# Altium PCB PCB1.PcbDoc
Units mil, origin at the board's own origin, x right, y up, seen from the top; angles counter-clockwise.
Board outline 2447.97 x 1725 mil, 2 copper layers (Top Layer, Bottom Layer); 56 components, 31 nets, 180 pads, 170 vias.
Unrouted connection lines stored in the file: 1.
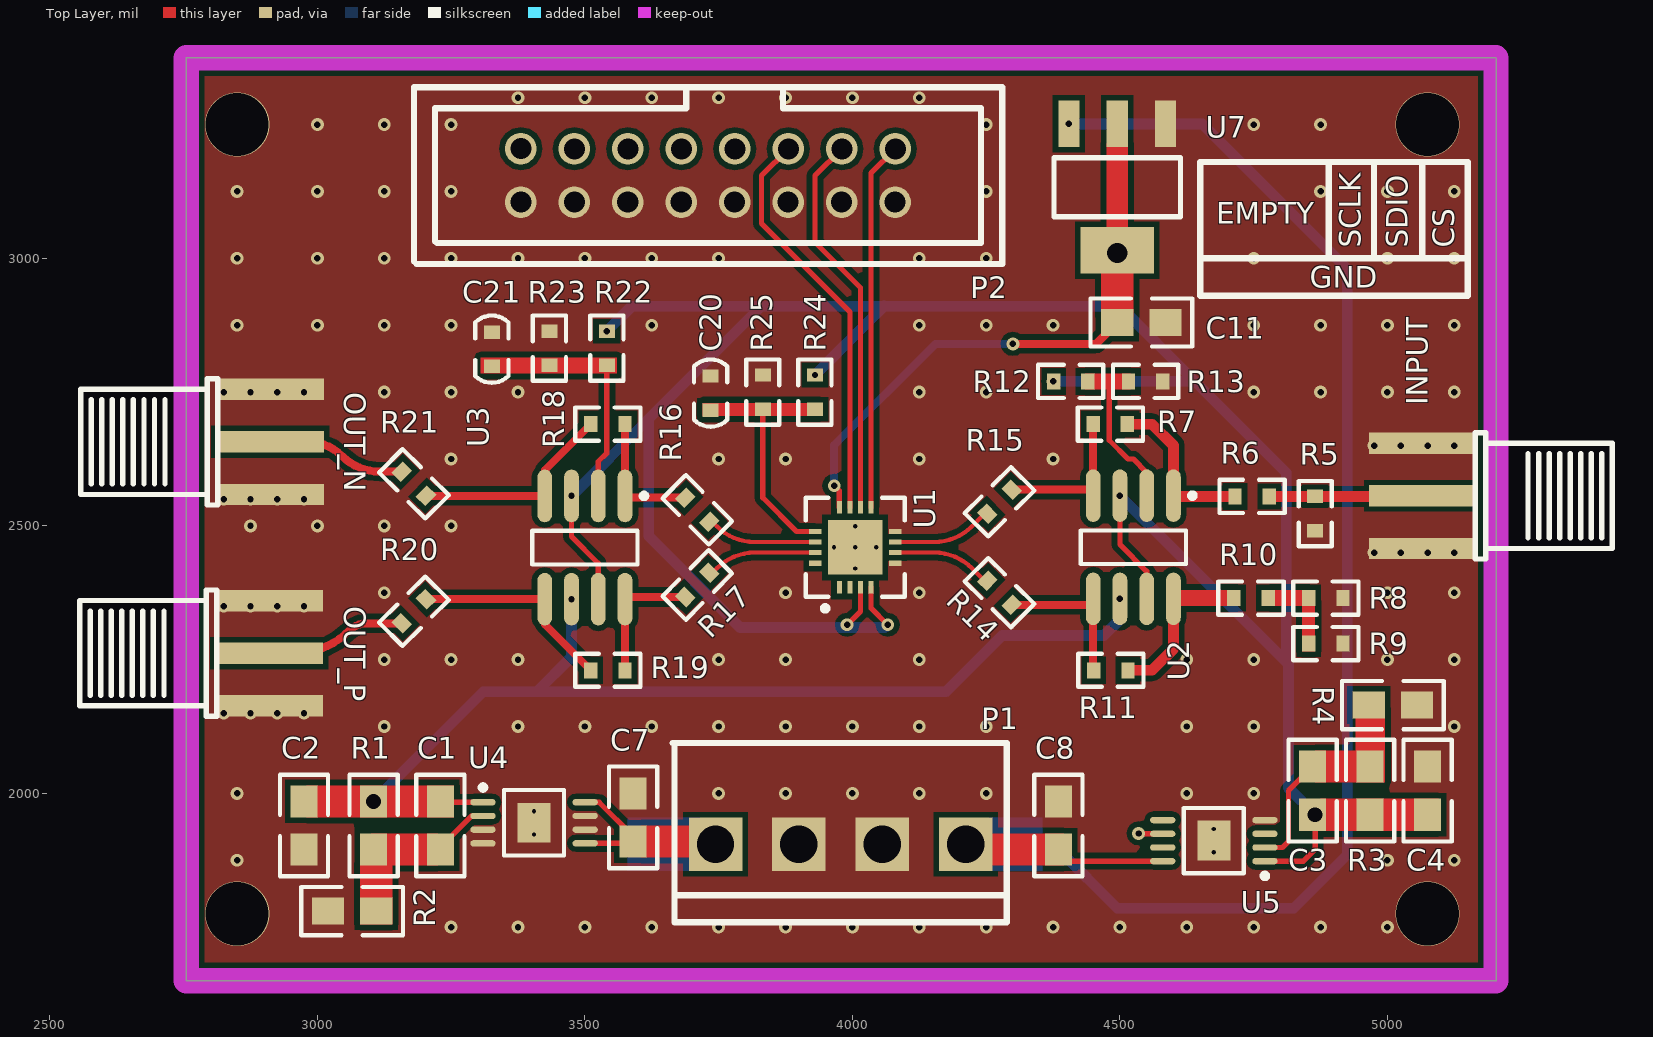
[diagram p0: Top Layer view]
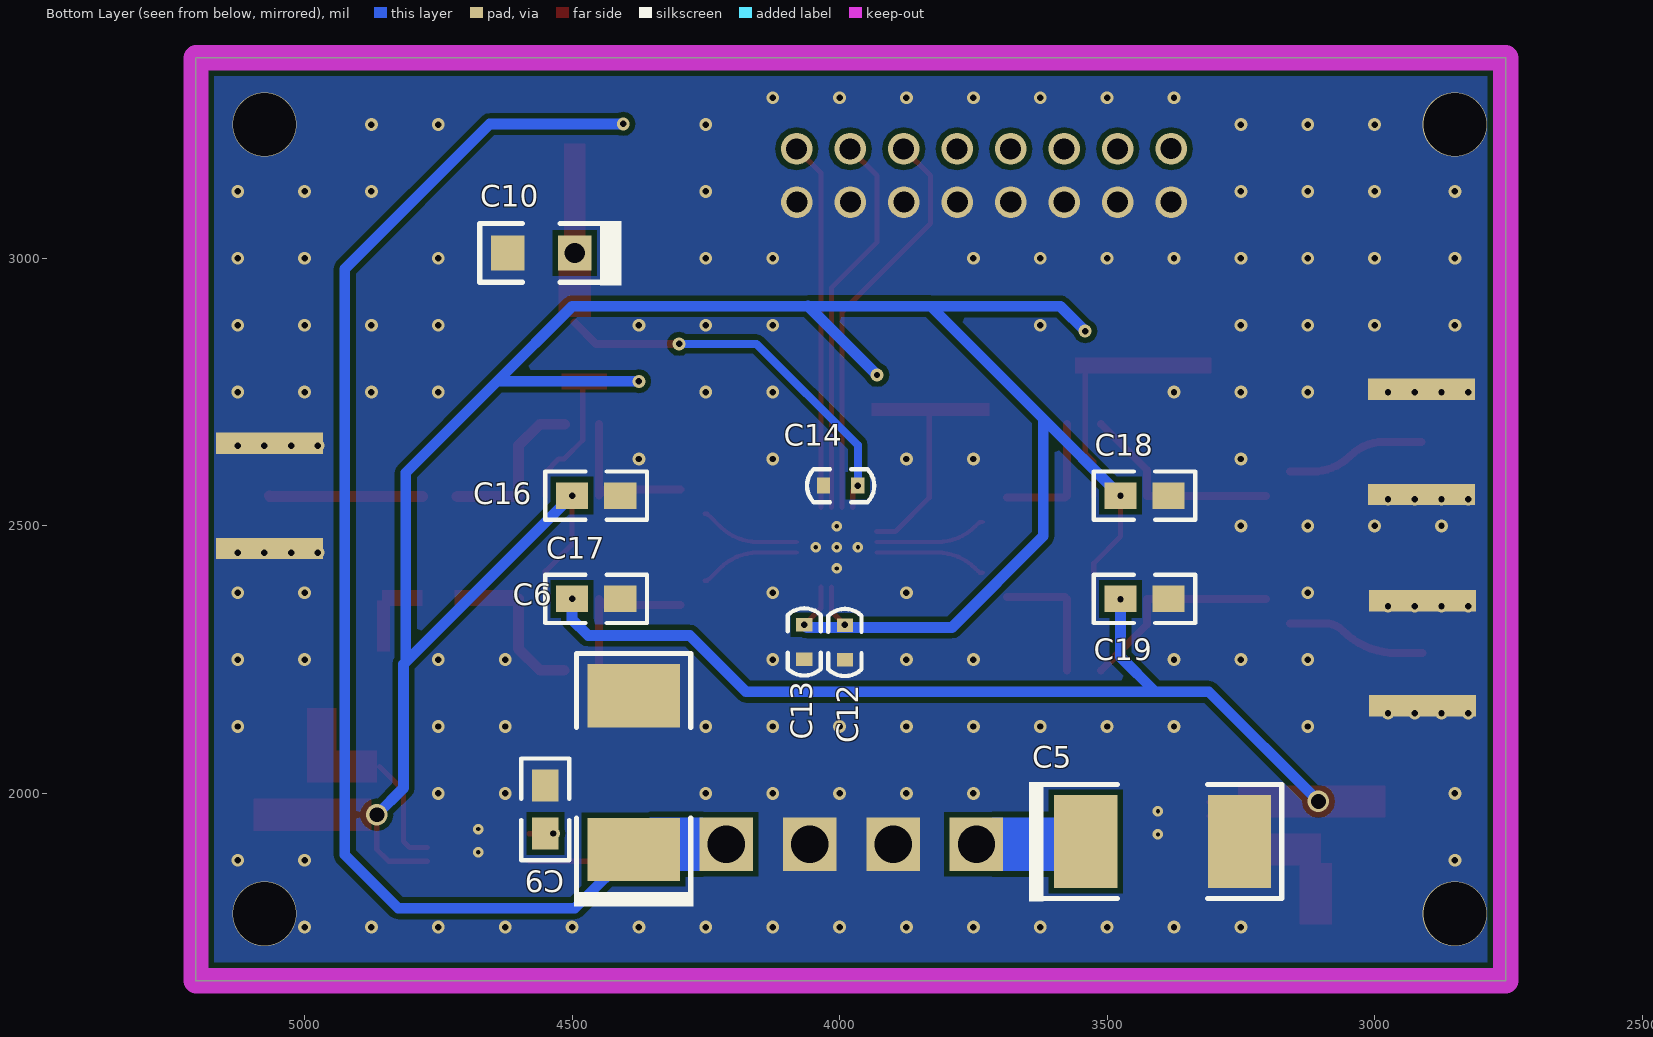
[diagram p1: Bottom Layer view, seen from below]

## Layer stack, top to bottom
Top Solder: solder mask 0.4, Solder Resist, Dk 3.5
Top Layer: signal copper 1.4
Dielectric 1: dielectric 12.6, FR-4, Dk 4.8
Bottom Layer: signal copper 1.4
Bottom Solder: solder mask 0.4, Solder Resist, Dk 3.5

## Board outline
2755,1650 5202.97,1650 5202.97,3375 2755,3375

## Design rules (kind name [scope] priority, off if disabled: settings)
Clearance [All] p1: gap=10
DiffPairsRouting [All] p1: maxlimit=100 minlimit=10 mostfreqgap=30 toplayer_minwidth=6 toplayer_maxwidth=100 toplayer_prefwidth=15 bottomlayer_minwidth=6 bottomlayer_maxwidth=100 bottomlayer_prefwidth=15 maxuncoupledlength=500
PlaneConnect [All] p1: planeconnectstyle=Direct reliefexpansion=20 reliefentries=4 reliefconductorwidth=10 reliefairgap=10
PolygonConnect [All] p1: connectstyle=Direct reliefconductorwidth=10 reliefentries=4 polygonreliefangle="90 Angle" airgapwidth=10
RoutingVias [All] p1: holewidth=28 width=50 viastyle="Through Hole" minholewidth=28 minwidth=50 maxholewidth=28 maxwidth=50
SolderMaskExpansion [All] p1: expansion=4
Width [All] p1: maxlimit=100 minlimit=10 preferedwidth=10
28 further rules are at their usual default settings.

## Classes and differential pairs
differential pair IN1: +IN1_P -IN1_N
differential pair IN2: +IN2_P -IN2_N
differential pair OUT1: +OUT1_P -OUT1_N
differential pair OUT2: +OUT2_P -OUT2_N
differential pair OUT3: +OUT3_P -OUT3_N
differential pair OUT4: +OUT4_P -OUT4_N

## Components (designator, comment, footprint, x,y, rotation, side; value= is the part's Value field where it differs from the comment)
C1 "0.1uf" 0805 3230,1895 r90 top
C2 "0.1uf" 0805 2975,1895 r90 top
C3 "0.1uf" 0805 4860,2050 r270 top
C4 "0.1uf" 0805 5075,2050 r270 top
C5 "Cap" 7343C-TYPE_D 3540,1910 r0 bottom
C6 "Cap" 7343C-TYPE_D 4385,1895 r270 bottom
C7 "0.1uf" 0805 3590,2000 r270 top
C8 "0.1uf" 0805 4385,1985 r270 top
C9 "0.1uf" 0805 4550,2015 r270 bottom
C10 "Cap" 3216C-TYPE_A 4495,3010 r180 bottom
C11 "0.1uf" 0805 4585,2880 r180 top
C12 "0.1uf" 0603C 3990,2314 r270 bottom
C13 "0.1uf" 0603C 4066,2315 r270 bottom
C14 "0.1uf" 0603C 3966,2575 r0 bottom
C16 "0.1uf" 0805 4500,2556.46 r180 bottom
C17 "0.1uf" 0805 4500,2363.54 r180 bottom
C18 "0.1uf" 0805 3385,2556.46 r0 bottom
C19 "0.1uf" 0805 3385,2363.54 r0 bottom
C20 "0.1uf" 0603C 3735,2780.16 r270 top
C21 "0.1uf" 0603C 3326,2798.16 r90 top
INPUT "差分输出" SMA-LYING 5125,2560 r180 top (schematic designator Vo_S1)
OUT_N "差分输出" SMA-LYING 2853,2653 r0 top (schematic designator Vo_S3)
OUT_P "差分输出" SMA-LYING 2851,2258 r0 top (schematic designator Vo_S2)
P1 "VH3.96-4A" VH3.96-4P 4288.58,1759.33 r180 top
P2 "DC3-16P" DC3-14P 4279.8,3320 r180 top
R1 "0" 0805 3105,1895 r90 top
R2 "0" 0805 3020,1780 r0 top
R3 "0" 0805 4967.5,2050 r270 top
R4 "0" 0805 5055,2165 r180 top
R5 "56R" 0603R 4865,2523 r90 top
R6 "560R" 0603R 4747,2555 r0 top
R7 "560R" 0603R 4482,2690 r0 top
R8 "56R" 0603R 4885,2365 r0 top
R9 "49R9" 0603R 4885,2280 r0 top
R10 "560R" 0603R 4745,2365 r0 top
R11 "560R" 0603R 4483,2230 r0 top
R12 "100k" 0603R 4408,2770 r180 top
R13 "100k" 0603R 4548,2770 r180 top
R14 "15R" 0603R 4275,2375 r315 top
R15 "15R" 0603R 4275,2545 r45 top
R16 "360R" 0603R 3710,2530 r315 top
R17 "360R" 0603R 3710,2389.68 r45 top
R18 "360R" 0603R 3543,2690 r0 top
R19 "360R" 0603R 3543,2230 r0 top
R20 "49R9" 0603R 3180.37,2340.37 r225 top
R21 "49R9" 0603R 3180.37,2578.63 r135 top
R22 "5.1K" 0603R 3541,2832 r270 top
R23 "1.6K" 0603R 3433.5,2832 r90 top
R24 "5.1K" 0603R 3930,2750 r90 top
R25 "1.6K" 0603R 3832.5,2750 r90 top
U1 "LMH6518SQ" SQA16A 4005.2,2459.84 r90 top
U2 "LMH6552" TI-D8_M 4525,2460 r270 top
U3 "LMH6552" TI-D8_M 3500,2459.46 r270 top
U4 "TPS7A3401DGNR" TI-DGN8-1760X1425TP_N 3405,1945 r0 top
U5 "TPS7A4901DGNR" TI-DGN8-1760X1425TP_L 4675.47,1911.61 r180 top
U7 "AMS1117-3.3V" SOT-223 4495,3133.11 r90 top

## Footprints (in the part's own frame and the unit in brackets; to place one, negate y for a bottom-side part, rotate by r counter-clockwise, add the part's x,y. Pads: shape width x height; smd on the part's side, far side on the other; paste and mask are expansions set on the pad)
0603C [mil]
  rect 25x30 smd: 1(0,0) 2(64,0)
  silkscreen extent -31,-31 95,31
0603R [mil]
  rect 25x30 smd: 1(-32,0) 2(32,0)
  silkscreen extent -61,-31 61,31
0805 [mil]
  rect 60x50 smd: 1(0,0) 2(90,0)
  silkscreen extent -50,-45 140,45
3216C-TYPE_A [mm]
  rect 1.6x1.65 smd: 1(0,0) 2(-3.175,0)
  silkscreen extent -4.51,-1.54 2.22,1.52
7343C-TYPE_D [mm]
  rect 3x4.4 smd: 1(0,0) 2(-7.3,0)
  silkscreen extent -9.31,-2.84 2.7,2.84
DC3-14P [mm]
  round 1.5 hole 1: 1(5.07,2.93) 2(5.08,5.461) 3(7.61,2.93) 4(7.618,5.461) 5(10.15,2.93) 6(10.157,5.461) 7(12.69,2.93) 8(12.695,5.461) 9(15.23,2.93) 10(15.233,5.461) 11(17.77,2.93) 12(17.772,5.461) 13(20.31,2.93) 14(20.31,5.461) 15(22.85,2.921) 16(22.85,5.461)
  silkscreen extent 0,0 27.92,8.4
SMA-LYING [mm]
  rect 5.08x1.016 smd: 0(1.5,0.1) 1(1.5,2.6) 1(1.5,-2.4)
  rect 5.08x1.016 smd far side: 1(1.5,2.6) 1(1.5,-2.4)
  silkscreen extent -7.5,-2.9 -1,3.1
SOT-223 [mm]
  rect 2.2x1 smd: 1(3,-2.3) 2(3,0) 3(3,2.3)
  rect 2.2x3.5 smd: 2(-3,0)
  silkscreen extent -1.4,-3 1.4,3, body extent -3.49,-3.24 3.49,3.24, height 1.64
SQA16A [mm] "QFN, 16-Leads, Body 4x4mm, Pitch 0.5mm, NSC Recommended"
  rect 0.6x0.25 smd paste-0.125 mask+0.051: 1(-1.9,0.75) 2(-1.9,0.25) 3(-1.9,-0.25) 4(-1.9,-0.75) 9(1.9,-0.75) 10(1.9,-0.25) 11(1.9,0.25) 12(1.9,0.75)
  rect 0.25x0.6 smd paste-0.125 mask+0.051: 5(-0.75,-1.9) 6(-0.25,-1.9) 7(0.25,-1.9) 8(0.75,-1.9) 13(0.75,1.9) 14(0.25,1.9) 15(-0.25,1.9) 16(-0.75,1.9)
  rect 2.6x2.6 smd paste-1.3 mask+0.051: 17(0,0)
  silkscreen extent -3.02,-2.35 2.35,2.35, body extent -2.05,-2.05 2.05,2.05, height 0.8
TI-D8_M [mm] "SOIC, 8-Leads, Body 4.9x3.9mm, Pitch 1.27mm, IPC Low Density"
  oval 2.5x0.7 smd: 1(-2.45,1.905) 2(-2.45,0.635) 3(-2.45,-0.635) 4(-2.45,-1.905) 5(2.45,-1.905) 6(2.45,-0.635) 7(2.45,0.635) 8(2.45,1.905)
  silkscreen extent -2.57,-2.5 0.8,2.93, body extent -2,-2.5 2,2.5, height 1.75
TI-DGN8-1760X1425TP_L [mm] "SOIC, 8-Leads, Body 3x3mm, Pitch 0.65mm, Thermal Pad 1.76x1.425mm, IPC High Density"
  oval 1.2x0.3 smd: 1(-2.425,0.975) 2(-2.425,0.325) 3(-2.425,-0.325) 4(-2.425,-0.975) 5(2.425,-0.975) 6(2.425,-0.325) 7(2.425,0.325) 8(2.425,0.975)
  rect 1.57x1.89 smd: 9(0,0)
  silkscreen extent -2.55,-1.55 1.43,1.8, body extent -1.55,-1.55 1.55,1.55, height 1.1
TI-DGN8-1760X1425TP_N [mm] "SOIC, 8-Leads, Body 3x3mm, Pitch 0.65mm, Thermal Pad 1.76x1.425mm, IPC Medium Density"
  oval 1.2x0.3 smd: 1(-2.425,0.975) 2(-2.425,0.325) 3(-2.425,-0.325) 4(-2.425,-0.975) 5(2.425,-0.975) 6(2.425,-0.325) 7(2.425,0.325) 8(2.425,0.975)
  rect 1.57x1.89 smd: 9(0,0)
  silkscreen extent -2.55,-1.55 1.43,1.8, body extent -1.55,-1.55 1.55,1.55, height 1.1
VH3.96-4P [mm]
  rect 2.54x2.54 hole 1.778: 1(1.95,-3.7) 2(5.91,-3.7) 3(9.87,-3.7) 4(13.83,-3.7)
  silkscreen extent 0,-8.5 15.87,0

## Part data
C1 C2 C3 C4 C7 C8 C9 C11 C12 C13 C14 C16 C17 C18 C19 C20 C21: library part Cap
C5 C6 C10: library part "Tantalium Cap"
INPUT OUT_N OUT_P: library part SMA
R1 R2 R3 R4 R5 R6 R7 R8 R9 R10 R11 R12 R13 R14 R15 R16 R17 R18 R19 R20 R21 R22 R23 R24 R25: library part Res
U1: "900 MHz, Digitally Controlled, Variable Gain Amplifier, 16-pin LLP"
U4: "Single Output Low Noise LDO, 200 mA, Adjustable -1.18 to -18 V Output, -3 to -20 V Input, 8-pin MSOP (DGN), -40 to 125 degC, Green (RoHS & no Sb/Br)"
U5: "Single Output High PSRR LDO, 150 mA, Adjustable 1.2 to 33 V Output, 3 to 36 V Input, with Ultra-Low Noise, 8-pin MSOP (DGN), -40 to 125 degC, Green (RoHS & no Sb/Br)"

## Via types
v1: diameter 24, hole 12, Top Layer to Bottom Layer, 154 vias
v2: diameter 19.68, hole 7.87, Top Layer to Bottom Layer, 9 vias
v3: diameter 120.08, hole 118.11, Top Layer to Bottom Layer, 4 vias
v4: diameter 40, hole 28, Top Layer to Bottom Layer, 2 vias
v5: diameter 50, hole 38, Top Layer to Bottom Layer, 1 vias

## Nets (pads, with @x,y where several pads share a name; then routed paths per layer and width w, separated by ;. In a path a pad name is that pad's centre, name@x,y a point inside that pad or via, vN(x,y) a via of type N, cw(c..) or ccw(c..) an arc to the next point about the centre after c; other vN are vias at no path point)
3.3V: C10.1 C11.2 C14.1 U1.12 U7.2 | length 744.2
  Top Layer w10: v1(3966,2575) 3975.67,2565.33 U1.12
  Top Layer w15: v1(4300,2840) 4455,2840 C11.2
  Bottom Layer w15: v1(3966,2575) 3966,2651 4155,2840 v1(4300,2840)
  other v5: 4495,3010
+5V: C3.2 C4.2 C12.1 C13.1 C16.1 C18.2 R3.2 R12.2 R22.1 R24.2 U1.3 U1.4 U2.3 U2.7 U3.3 U3.7 U5.1 | length 4964.5
  Top Layer w10: v1(3475,2555.91) 3475,2480 3525,2430 U3.7 ; v1(3990,2315) 4015.04,2340.04 U1.3 ; U1.4 4034.72,2346.28 v1(4066,2315) ; v1(4500,2556.46) 4500,2465 4550,2415 U2.7 ; U5.1 4843.23,1873.23 4865,1895 v4(4865,1960)
  Bottom Layer w20: v1(3475,2555.91) 3619.09,2700 ; v1(3541,2864) 3587,2910 3829.6,2910.51 ; v1(3930,2782) 4059,2911 ; v1(4066,2315) 4061,2310 3790,2310 3619.09,2480.91 3619.09,2700 ; v1(4375,2770) 4640,2770 ; v1(4500,2556.46) 4815,2241.46 4815,2010 v4(4865,1960) ; 4810.77,2246.46 4810.77,2599.23 4640,2770 ; 3619.09,2700 3829.6,2910.51 ; 3829.6,2910.51 3830,2910.51 4059,2911 ; 4059,2911 4500,2910 4640,2770
-5V: C1.2 C2.2 C17.1 C19.2 R1.2 U2.6 U3.6 U4.1 | length 1855
  Top Layer w10: C1.2 3231.61,1983.39 U4.1
  Bottom Layer w20: v4(3105,1985) 3310,2190 3410,2190 ; C19.2 v1(3475,2363) 3475,2255 3410,2190 ; v1(4500,2363.54) 4500,2325 4470,2295 4280,2295 4175,2190 3410,2190
CS: P2.1 U1.9 | length 688.8
  Top Layer w10: U1.9 4034.72,3159.17 P2.1
GND: C2.1 C4.1 C5.2 C6.2 C7.1 C8.1 C9.1 C10.2 C11.1 C12.2 C13.2 C14.2 C16.2 C17.2 C18.1 C19.1 C20.1 C21.2 INPUT.1 OUT_N.1 OUT_P.1 P1.2 P1.3 P2.2 P2.4 P2.6 P2.8 P2.10 P2.12 P2.14 P2.16 R2.1 R4.1 R5.1 R8.2 R9.2 R13.1 R23.2 R25.2 U1.5 U1.8 U4.3 U4.4 U4.6 U4.7 U4.9 U5.4 U5.9 U7.1
  other v1: 3250,1750 3375,1750 3500,1750 3625,1750 3750,1750 3875,1750 4000,1750 4125,1750 4250,1750 4375,1750 4500,1750 4625,1750 4750,1750 4875,1750 5000,1750 2850,1875 5000,1875 5125,1875 2850,2000 3750,2000 3875,2000 4000,2000 4125,2000 4250,2000 4625,2000 4750,2000 3125,2125 3375,2125 3500,2125 3625,2125 3750,2125 3875,2125 4000,2125 4125,2125 4250,2125 4625,2125 4750,2125 5125,2125 2825,2150 2875,2150 2925,2150 2975,2150 3125,2250 3250,2250 3375,2250 3750,2250 3875,2250 4125,2250 4625,2250 4750,2250 5000,2250 5125,2250 2825,2350 2875,2350 2925,2350 2975,2350 3125,2375 3875,2375 4125,2375 5000,2375 5125,2375 4975,2450 5025,2450 5075,2450 5125,2450 2875,2500 3000,2500 3125,2500 3250,2500 2825,2550 2875,2550 2925,2550 2975,2550 3250,2625 3750,2625 3875,2625 4125,2625 4375,2625 4975,2650 5025,2650 5075,2650 5125,2650 2825,2750 2875,2750 2925,2750 2975,2750 3125,2750 3250,2750 3375,2750 4125,2750 4250,2750 4750,2750 4875,2750 5000,2750 5125,2750 2850,2875 3000,2875 3125,2875 3250,2875 3625,2875 4125,2875 4250,2875 4375,2875 4750,2875 4875,2875 5000,2875 5125,2875 2850,3000 3000,3000 3125,3000 3250,3000 3375,3000 3500,3000 3625,3000 3750,3000 4125,3000 4250,3000 4750,3000 5000,3000 5125,3000 2850,3125 3000,3125 3125,3125 3250,3125 4250,3125 4875,3125 5000,3125 5125,3125 3000,3250 3125,3250 3250,3250 4250,3250 4750,3250 4875,3250 3375,3300 3500,3300 3625,3300 3750,3300 3875,3300 4000,3300 4125,3300
  other v2: 4675.47,1889.96 3405,1923.35 4675.47,1933.27 3405,1966.65 4005.2,2420.47 3965.83,2459.84 4005.2,2459.84 4044.57,2459.84 4005.2,2499.21
  other v3: 2850,1775 5075,1775 2850,3250 5075,3250
IN1_N: R7.1 R15.2 U2.4 | length 290.5
  Top Layer w15: R15.2 4438.83,2567.63 U2.4 R7.1
IN1_P: R11.1 R14.2 U2.5 | length 291
  Top Layer w15: R14.2 4438.83,2352.37 U2.5 4450,2231 R11.1
IN2_N: R14.1 U1.6 | length 194.8
  Top Layer w8: U1.6 4152.92,2450 cw(c4152.92,2350) 4223.63,2420.71 4242.72,2401.63 ccw(c4252.37,2411.28) R14.1 R14.1@4246.72,2397.63
IN2_P: R15.1 U1.7 | length 195
  Top Layer w8: U1.7 4152.61,2469.69 ccw(c4152.61,2569.69) 4223.32,2498.97 4242.72,2518.37 cw(c4252.37,2508.72) R15.1 R15.1@4246.72,2522.37
NetC1_1: C1.1 R1.1 R2.2 U4.2 | length 108.5
  Top Layer w10: C1.1 3230,1900 3287.8,1957.8 U4.2
NetC3_1: C3.1 R3.1 R4.2 U5.2 | length 207.3
  Top Layer w10: U5.2 4803.82,1898.82 4815,1910 4815,2005 C3.1
NetC9_2: C9.2 U5.6 | length 45.2
  Top Layer w10: v1(4535,1925) 4535.59,1924.41 U5.6
NetC20_2: C20.2 R24.1 R25.1 U1.13 | length 289.5
  Top Layer w10: R25.1 3832.5,2552.5 3895.63,2489.37 U1.13
NetC21_1: C21.1 R22.2 R23.1 U3.2 | length 250.7
  Top Layer w10: U3.2 3525,2620 3541,2636 R22.2
NetR5_2: INPUT.0 R5.2 R6.2 | length 287.4
  Top Layer w20: R6.2 R5.2 5064.88,2555 INPUT.0
NetR6_1: R6.1 R7.2 U2.1 | length 311.7
  Top Layer w20: R7.2 4560,2690 4600,2650 U2.1 4601.46,2555 R6.1
NetR8_1: R8.1 R9.1 R10.2
NetR10_1: R10.1 R11.2 U2.8 | length 195.1
  Top Layer w20: R11.2 4560,2230 4600,2270 U2.8
NetR12_1: R12.1 R13.2 U2.2 | length 248.4
  Top Layer w10: 4480,2770 4480,2660 4515,2625 4525,2625 4550,2600 U2.2
OUT1_N: R17.2 U1.15 | length 214.1
  Top Layer w8: R17.2@3738.28,2412.31 R17.2 ccw(c3732.63,2425.97) 3742.28,2416.31 3746.68,2420.71 cw(c3817.39,2350) 3817.39,2450 U1.15
OUT1_P: R16.2 U1.14 | length 214.1
  Top Layer w8: R16.2@3738.28,2507.37 R16.2 cw(c3732.63,2493.72) 3742.28,2503.37 3746.68,2498.97 ccw(c3817.39,2569.69) 3817.39,2469.69 U1.14
OUT2_N: R17.1 R19.2 U3.8 | length 247.1
  Top Layer w15: R19.2 U3.8 3579.06,2367.06 R17.1
OUT2_P: R16.1 R18.2 U3.1 | length 247.8
  Top Layer w15: R18.2 U3.1 3578.29,2552.63 R16.1
OUT3_N: R18.1 R21.1 U3.4 | length 391.7
  Top Layer w15: R21.1 3203.09,2555.91 U3.4 3425,2604 R18.1
OUT3_P: R19.1 R20.1 U3.5 | length 390.6
  Top Layer w15: R20.1 U3.5 3425,2316 R19.1
OUT4_N: OUT_N.0 R21.2 | length 260.6
  Top Layer w15: OUT_N.0 2982.23,2656.94 cw(c2982.23,2566.83) 3045.95,2630.54 ccw(c3116.66,2701.25) 3116.66,2601.25 R21.2
OUT4_P: OUT_P.0 R20.2 | length 262.6
  Top Layer w15: OUT_P.0 2957.49,2261.94 ccw(c2957.49,2406.94) 3060.02,2304.41 cw(c3092.23,2272.2) 3092.23,2317.75 R20.2
SCLK: P2.5 U1.11 | length 759.3
  Top Layer w10: P2.5 3830,3154.45 3830,3065 3995.35,2899.65 U1.11
SDIO: P2.3 U1.10 | length 726
  Top Layer w10: P2.3 3930,3154.45 3930,3030 4015.04,2944.96 U1.10
VCC: C6.1 C8.2 P1.1 U5.5 U5.8 U7.3 | length 2558.9
  Top Layer w10: C8.2 4406.77,1873.23 U5.8
  Bottom Layer w20: C6.1 4495,1785 4825,1785 4925,1885 4925,2980 4653.78,3251.22 v1(4404.45,3251.22)
VDD: C5.1 C7.2 P1.4 U4.5 U4.8 | length 216.7
  Top Layer w10: U4.5 3586.61,1906.61 C7.2 3590,1920 3526.61,1983.39 U4.8
pads on no net: P2.7 P2.9 P2.11 P2.13 P2.15 U1.1 U1.2 U1.16 U1.17 U5.3 U5.7

## Polygon pours and split planes (outlines as drawn)
GND on Bottom Layer "Top Layer-No Net" (solid, pour order 4): 2755,1650 5202.97,1650 5202.97,3375 2755,3375
GND on Top Layer "Top Layer-No Net" (solid, pour order 6): 5202.97,1650 5202.97,3375 2755,3375 2755,1650

## Keep-outs
Keep-Out Layer:
  the board outline again, w47.24

## Other copper
Top Layer:
  rectangle net 3.3V: 4465,2890 4525,2995
  rectangle net NetR12_1: 4435,2755 4520,2785
  rectangle net NetC20_2: 3720,2705 3940,2730
  rectangle net 3.3V: 4475,3035 4515,3215
  rectangle net NetC21_1: 3305,2785 3560,2815
  rectangle net NetR10_1: 4605,2350 4720,2380
  rectangle net NetR8_1: 4780,2350 4855,2380
  rectangle net NetR8_1: 4840,2265 4865,2360
  rectangle net +5V: 4875,1930 5095,1990
  rectangle net NetC3_1: 4940,2020 4995,2160
  rectangle net NetC3_1: 4865,2020 4980,2080
  rectangle net NetC1_1: 3080,1755 3140,1870
  rectangle net -5V: 2980,1955 3255,2015
  rectangle net NetC1_1: 3100,1865 3225,1925
  rectangle net VCC: 4245,1865 4395,1925
  rectangle net VDD: 3605,1880 3720,1940
Bottom Layer:
  rectangle net VCC: 4255,1855 4355,1955
  rectangle net VDD: 3580,1855 3715,1955

## Silkscreen, mask and mechanical layers (free items; w line width, h text height)
Top Overlay:
  lines w11.81: 4890,3000 4890,3180 ; 4975,3000 4975,3180 ; 5065,3000 5065,3180 ; 4650,3000 4650,2930 5150,2930 5150,3000 ; 4650,3000 4650,3180 5150,3180 5150,3000 ; 4650,3000 5150,3000
  text "EMPTY" at 4680,3065 h40
  text "SCLK" at 4950,3020 h40 r90
  text "SDIO" at 5037.5,3020 h40 r90
  text "CS" at 5125,3020 h40 r90
  text "GND" at 4855,2945 h40